# EAGLE board Schematic_IR _1.0 (EAGLE 9.6.2)
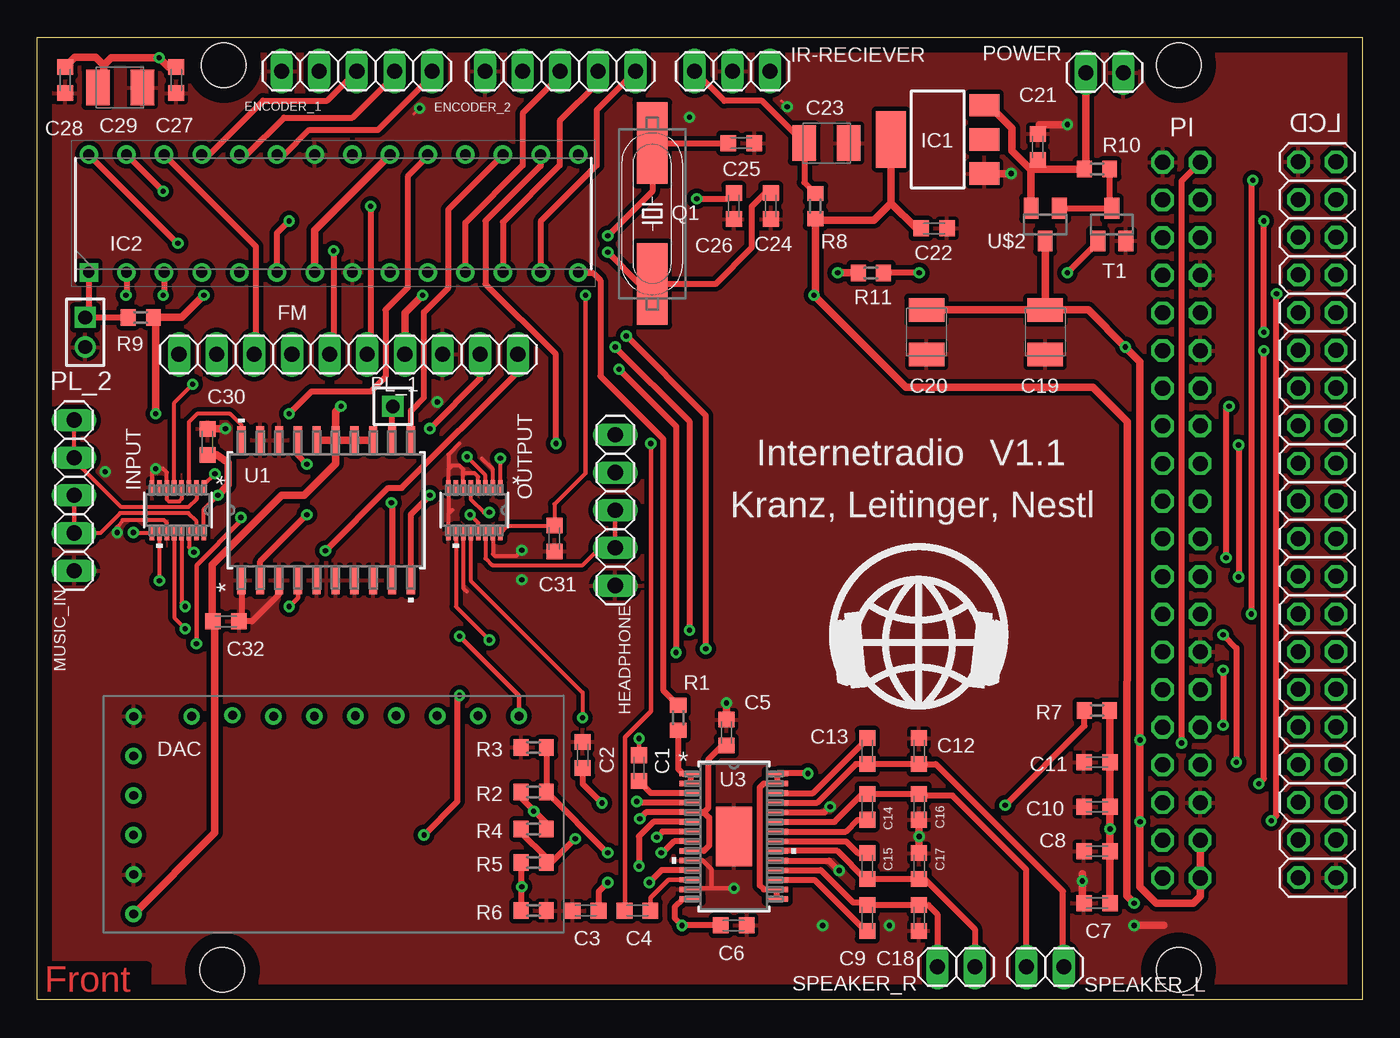
[diagram p0: board, top side]
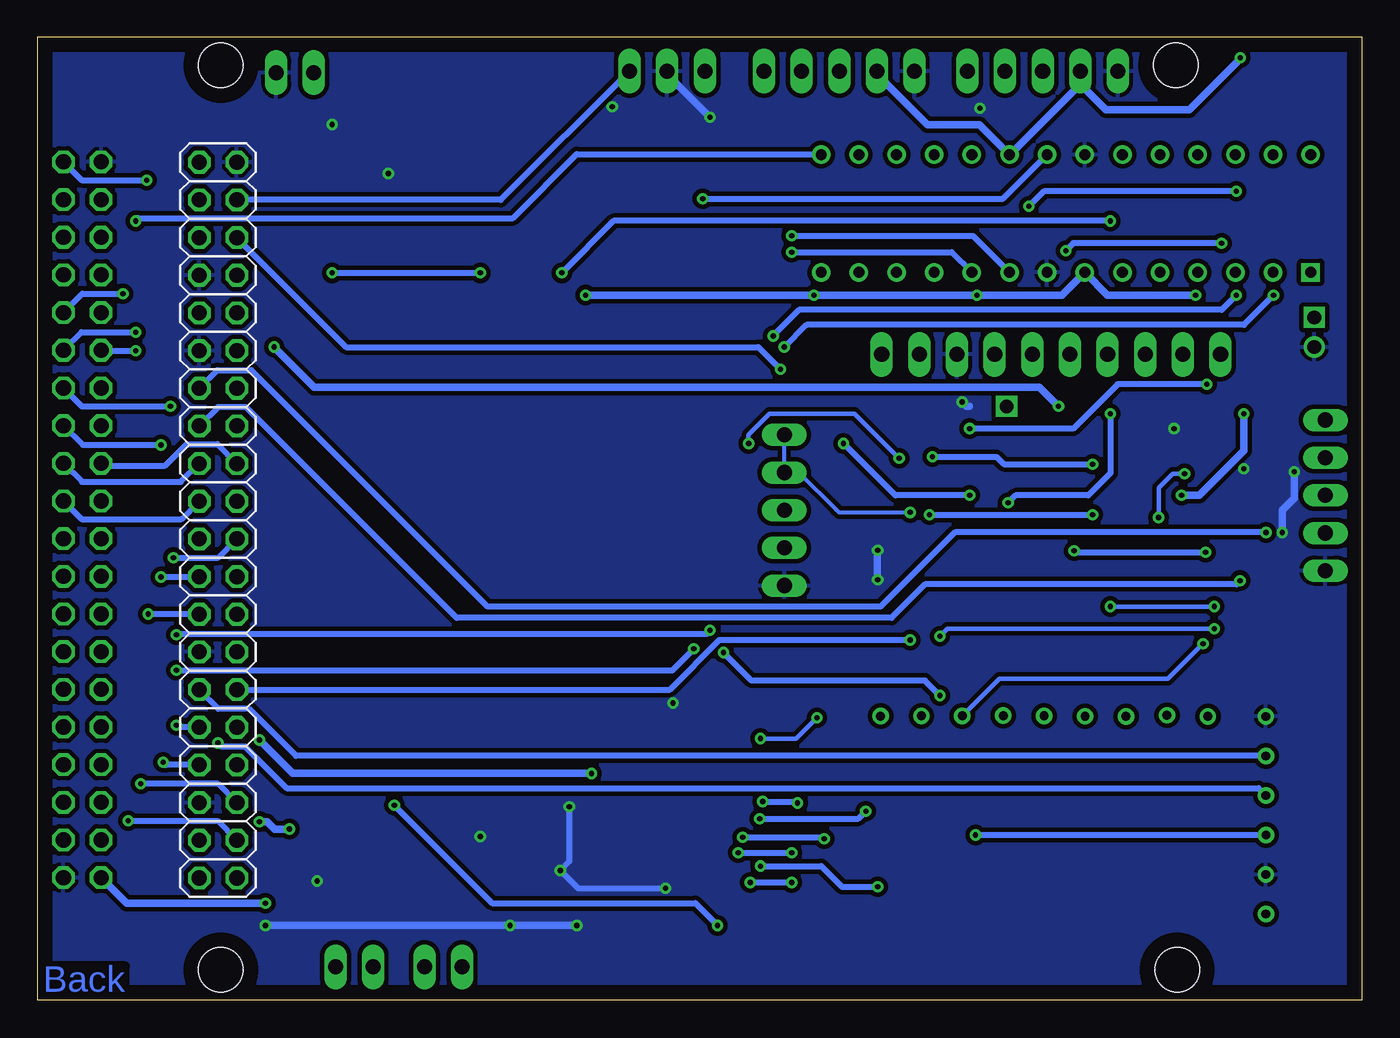
[diagram p1: board, bottom side, seen from below]

Size 89.4 x 64.9 mm. Coordinates in mm from the lower left corner, seen from the top.
Outline: 0,0 0,64.9 89.4,64.9 89.4,0 0,0
Copper layers (1*16): Top 0.035mm / dielectric 1.5mm / Bottom 0.035mm
Design rules "default *": minimum track width 0.2mm, minimum drill 0.2mm, track to track 5mil, track to pad 10mil, pad to pad 5mil, via to via 10mil, smd to smd 6mil, copper to edge 40mil, drill to drill 6mil, minimum pad ring 10mil, minimum via ring 8mil, stop-mask expansion 4mil, vias tented up to drill 0mil, thermal gap 10mil
Holes 3 mm at 77,2 77,63 12.6,63 12.5,2

## Footprints (pad centres in the part's own frame; a part is rotated, then mirrored left to right if it is on the bottom)
C0603K = smd 1.05 x 1.08: 1 -0.875,0; 2 0.875,0
SMC_B = smd 1.6 x 2.4: + -1.5,0; - 1.5,0
PCM5102 = drill 0.6: A3V3 1.375,16.968; AGND1 1.365,25.248; AGND2 1.355,19.728; BCK 4.074,2.01; DEMP 1.328,8.688; DIN 6.739,2.01; FLT 1.405,5.928; FMT 1.395,14.208; GND 12.068,2.02; LCK 9.403,2; LOUT 1.385,28.008; ROUT 1.365,22.488; SCK 1.41,2.02; VIN 14.732,2.01; XSMT 1.405,11.448
1X05 = drill 1.016 long: 1 -5.08,0; 2 -2.54,0; 3 0,0; 4 2.54,0; 5 5.08,0
1X10 = drill 1.016 long: 1 -11.43,0; 2 -8.89,0; 3 -6.35,0; 4 -3.81,0; 5 -1.27,0; 6 1.27,0; 7 3.81,0; 8 6.35,0; 9 8.89,0; 10 11.43,0
SOT223 = smd 1.5 x 2: 1 -2.3,-3.15; 2 0,-3.15; 3 2.3,-3.15 | smd 3.8 x 2: 4 0,3.15
DIP794W53P254L3467H457Q28N = drill 0.733 pad 1.133 square: 1 -3.969,16.51 | drill 0.733 pad 1.133: 2 -3.969,13.97; 3 -3.969,11.43; 4 -3.969,8.89; 5 -3.969,6.35; 6 -3.969,3.81; 7 -3.969,1.27; 8 -3.969,-1.27; 9 -3.969,-3.81; 10 -3.969,-6.35; 11 -3.969,-8.89; 12 -3.969,-11.43; 13 -3.969,-13.97; 14 -3.969,-16.51; 15 3.969,-16.51; 16 3.969,-13.97; 17 3.969,-11.43; 18 3.969,-8.89; 19 3.969,-6.35; 20 3.969,-3.81; 21 3.969,-1.27; 22 3.969,1.27; 23 3.969,3.81; 24 3.969,6.35; 25 3.969,8.89; 26 3.969,11.43; 27 3.969,13.97; 28 3.969,16.51
SOIC_309DYYR_TEX = smd 0.972 x 0.305: 1 -1.54,1.75; 2 -1.54,1.25; 3 -1.54,0.75; 4 -1.54,0.25; 5 -1.54,-0.25; 6 -1.54,-0.75; 7 -1.54,-1.25; 8 -1.54,-1.75; 9 1.54,-1.75; 10 1.54,-1.25; 11 1.54,-0.75; 12 1.54,-0.25; 13 1.54,0.25; 14 1.54,0.75; 15 1.54,1.25; 16 1.54,1.75
1X03 = drill 1.016 long: 1 -2.54,0; 2 0,0; 3 2.54,0
2X20 = drill 1.016 octagon: 1 -24.13,-1.27; 2 -24.13,1.27; 3 -21.59,-1.27; 4 -21.59,1.27; 5 -19.05,-1.27; 6 -19.05,1.27; 7 -16.51,-1.27; 8 -16.51,1.27; 9 -13.97,-1.27; 10 -13.97,1.27; 11 -11.43,-1.27; 12 -11.43,1.27; 13 -8.89,-1.27; 14 -8.89,1.27; 15 -6.35,-1.27; 16 -6.35,1.27; 17 -3.81,-1.27; 18 -3.81,1.27; 19 -1.27,-1.27; 20 -1.27,1.27; 21 1.27,-1.27; 22 1.27,1.27; 23 3.81,-1.27; 24 3.81,1.27; 25 6.35,-1.27; 26 6.35,1.27; 27 8.89,-1.27; 28 8.89,1.27; 29 11.43,-1.27; 30 11.43,1.27; 31 13.97,-1.27; 32 13.97,1.27; 33 16.51,-1.27; 34 16.51,1.27; 35 19.05,-1.27; 36 19.05,1.27; 37 21.59,-1.27; 38 21.59,1.27; 39 24.13,-1.27; 40 24.13,1.27
1X01M = drill 0.914 square: 1 0,0
1X02M = drill 0.914 square: 1 -1,0 | drill 0.914: 2 1,0
1X02 = drill 1.016 long: 1 -1.27,0; 2 1.27,0
11.4X4.5 = smd 5.5 x 2.08: 1 -4.75,0; 2 4.75,0
R0603 = smd 1 x 1.1: 1 -0.85,0; 2 0.85,0
SOT23 = smd 1 x 1.4: 1 -0.95,-1.1; 2 0.95,-1.1; 3 0,1.1
M20B_TEX = smd 1.887 x 0.558: 1 -4.728,5.715; 2 -4.728,4.445; 3 -4.728,3.175; 4 -4.728,1.905; 5 -4.728,0.635; 6 -4.728,-0.635; 7 -4.728,-1.905; 8 -4.728,-3.175; 9 -4.728,-4.445; 10 -4.728,-5.715; 11 4.728,-5.715; 12 4.728,-4.445; 13 4.728,-3.175; 14 4.728,-1.905; 15 4.728,-0.635; 16 4.728,0.635; 17 4.728,1.905; 18 4.728,3.175; 19 4.728,4.445; 20 4.728,5.715
PWP28_2P4X3.4_TEX = smd 1.462 x 0.355: 1 -2.921,4.225; 2 -2.921,3.575; 3 -2.921,2.925; 4 -2.921,2.275; 5 -2.921,1.625; 6 -2.921,0.975; 7 -2.921,0.325; 8 -2.921,-0.325; 9 -2.921,-0.975; 10 -2.921,-1.625; 11 -2.921,-2.275; 12 -2.921,-2.925; 13 -2.921,-3.575; 14 -2.921,-4.225; 15 2.921,-4.225; 16 2.921,-3.575; 17 2.921,-2.925; 18 2.921,-2.275; 19 2.921,-1.625; 20 2.921,-0.975; 21 2.921,-0.325; 22 2.921,0.325; 23 2.921,0.975; 24 2.921,1.625; 25 2.921,2.275; 26 2.921,2.925; 27 2.921,3.575; 28 2.921,4.225 | smd 2.413 x 4.013: EPAD 0,0

## Placement (x,y rotation side)
C1  1µF  [C0603K]  40.6,15.6 270 top
C2  1µF  [C0603K]  36.8,16.5 270 top
C3  1µF  [C0603K]  37,6 0 top
C4  1µF  [C0603K]  40.5,6 0 top
C5  1µF  [C0603K]  46.5,18 90 top
C6  1µF  [C0603K]  47,5 180 top
C7  1nF  [C0603K]  71.5,6.5 180 top
C8  100nF  [C0603K]  71.5,10 180 top
C9  220nF  [C0603K]  56,5.5 90 top
C10  1nF  [C0603K]  71.5,13 180 top
C11  100nF  [C0603K]  71.5,16 180 top
C12  1nF  [C0603K]  59.5,16.75 90 top
C13  220nF  [C0603K]  56,16.75 270 top
C14  220nF  [C0603K]  56,13 90 top
C15  220nF  [C0603K]  56,9 270 top
C16  1nF  [C0603K]  59.5,13 90 top
C17  1nF  [C0603K]  59.5,9 90 top
C18  1nF  [C0603K]  59.5,5.5 90 top
C19  100µF  [SMC_B]  68,45 270 top
C20  100µF  [SMC_B]  60,45 270 top
C21  0,1uF  [C0603K]  67.5,57.5 270 top
C22  10uF  [C0603K]  60.5,52 180 top
C23  0.1µF  [SMC_B]  53.25,57.75 0 top
C24  20pF  [C0603K]  49.5,53.5 90 top
C25  20pF  [C0603K]  47.5,57.75 180 top
C26  20pF  [C0603K]  47,53.5 270 top
C27  1µF  [C0603K]  9.4,62 270 top
C28  1µF  [C0603K]  1.9,62 270 top
C29  4,7µF  [SMC_B]  5.6,61.5 0 top
C30  0.1µF  [C0603K]  11.5,37.6 270 top
C31  0.1µF  [C0603K]  34.9,31.1 90 top
C32  0.1µF  [C0603K]  12.75,25.5 0 top
DAC  PCM5102  [PCM5102]  4.5,20.5 270 top
ENCODER_1  [1X05]  21.57,62.6 180 top
ENCODER_2  [1X05]  35.29,62.6 180 top
FM  [1X10]  21,43.5 180 top
HEADPHONE  [1X05]  39,33 90 top
IC1  LD117AS33TR  [SOT223]  60.75,58 90 top
IC2  ATMEGA328P-PU  [DIP794W53P254L3467H457Q28N]  20,53 90 top
INPUT  TMUX1309DYYR  [SOIC_309DYYR_TEX]  9.5,33 270 top
IR-RECIEVER  [1X03]  46.9,62.6 180 top
LCD  [2X20]  86.35,32.35 90 top
MUSIC_IN  [1X05]  2.5,34 90 top
OUTPUT  TMUX1309DYYR  [SOIC_309DYYR_TEX]  29.5,33 270 top
PI  [2X20]  77.19,32.33 90 bottom
PL_1  [1X01M]  24,40 270 top
PL_2  [1X02M]  3.25,45 270 top
POWER  [1X02]  72,62.5 0 top
Q1  [11.4X4.5]  41.5,53 90 top
R1  10k  [R0603]  43.25,19 270 top
R2  56k  [R0603]  33.5,14 180 top
R3  39k  [R0603]  33.5,17 0 top
R4  33k  [R0603]  33.5,11.5 0 top
R5  33k  [R0603]  33.5,9.25 0 top
R6  33k  [R0603]  33.5,6 180 top
R7  10  [R0603]  71.5,19.5 0 top
R8  100  [R0603]  52.5,53.5 270 top
R9  10k  [R0603]  7,46 0 top
R10  10k  [R0603]  71.5,56 180 top
R11  10k  [R0603]  56.25,49 0 top
SPEAKER_L  [1X02]  68,2.2 180 top
SPEAKER_R  [1X02]  62,2.2 180 top
T1  BC850  [SOT23]  72.5,52.25 0 top
U1  LM1972M/NOPB  [M20B_TEX]  19.5,33 90 top
U3  TPA3144D2PWP  [PWP28_2P4X3.4_TEX]  47,11 0 top
U$1  [LOGO]  59.5,24 0 top
U$2  P-KANAL  [SOT23]  68,52.25 180 top

## Library data of the parts
C1-C32 = rcl; SPICEPREFIX: C
DAC U$1 U$2 = Fancy_InternetRadio
ENCODER_1 ENCODER_2 LCD PI = pinhead
FM HEADPHONE IR-RECIEVER MUSIC_IN PL_1 PL_2 POWER SPEAKER_L SPEAKER_R = pinhead-ext
IC1 = v-reg
IC2 = Fancy_InternetRadio; DESCRIPTION: MICROCHIP - ATMEGA328P-PU. - MICROCONTROLLER MCU, 8 BIT, ATMEGA, 20MHZ, DIP-28; HEIGHT: 4.572mm; MANUFACTURER_NAME: Microchip; MANUFACTURER_PART_NUMBER: ATMEGA328P-PU; MOUSER_PART_NUMBER: 556-ATMEGA328P-PU; MOUSER_PRICE-STOCK: https://www.mouser.co.uk/ProductDetail/Microchip-Technology-Atmel/ATMEGA328P-PU/?qs=K8BHR703ZXguOQv3sKbWcg%3D%3D
INPUT OUTPUT = Fancy_InternetRadio; BUILT_BY: EMA_Matt; COPYRIGHT: Copyright (C) 2018 Accelerated Designs. All rights reserved; DATASHEET: https://www.ti.com/lit/ds/symlink/tmux1309.pdf?ts=1598032150860&ref_url=https%253A%252F%252Fwww.ti.com%252Fsitesearch%252Fdocs%252Funiversalsearch.tsp%253FsearchTerm%253DTMUX1309DYYR; MANUFACTURER_PART_NUMBER: TMUX1309DYYR; SOURCELIBRARY: TI_2020-08-21; VENDOR: Texas Instruments
Q1 = crystal-geyer_V1_0
R1-R11 = eagle-ltspice; SPICEMODEL: NONE; SPICEPREFIX: R
T1 = transistor-neu-to92
U1 = Fancy_InternetRadio; BUILT_BY: EMA_UL_Team; MANUFACTURER_PART_NUMBER: LM1972M/NOPB; SOURCELIBRARY: National_2014-06-20; VENDOR: Texas Instruments
U3 = Fancy_InternetRadio; BUILT_BY: EMA_Molly; COPYRIGHT: Copyright (C) 2018 Accelerated Designs. All rights reserved; MANUFACTURER_PART_NUMBER: TPA3144D2PWP; SOURCELIBRARY: TI_2019-05-11; VENDOR: Texas Instruments

## Nets
3V3: C22.2 C27.1 C28.1 C29.+ C30.2 C31.2 ENCODER_1.4 ENCODER_2.4 FM.4 IC1.4 IC2.7 IC2.20 INPUT.16 LCD.2 OUTPUT.16 R8.2 R9.2
5V: C7.1 C8.1 C10.1 C11.1 C19.+ C20.+ C32.1 DAC.VIN PI.2 PI.4 R7.2 U1.13 U1.14 U1.15 U1.16 U3.15 U3.16 U3.27 U3.28 U$2.3
/RST: IC2.1 PL_2.1 R9.1
/SEN: FM.7
/SHUTDOWN: IC2.14 R1.1
AREF: C26.1 IC2.21
AT_CLOCK: IC2.19 U1.9
AT_DIN: IC2.17 U1.11
AT_DOUT: PL_1.1 U1.12
AT_L/S: IC2.16 U1.10
AUDIO_IN_L: INPUT.13 U1.4
AUDIO_IN_R: INPUT.3 U1.20
AUDIO_OUT_L: OUTPUT.13 U1.2
AUDIO_OUT_R: OUTPUT.3 U1.17
BCK: DAC.BCK PI.12
CS: LCD.23 PI.24
DAC_LOUT: DAC.LOUT INPUT.12
DAC_ROUT: DAC.ROUT INPUT.1
DC: LCD.25 PI.18
DIN: DAC.DIN PI.40
FM_/RST: FM.8 IC2.26
FM_GPIO01: FM.9
FM_GPIO02: FM.10
FM_LOUT: FM.1 INPUT.14
FM_ROUT: FM.2 INPUT.5
FM_SCLK: FM.6 IC2.28
FM_SDIO: FM.5 IC2.27
GND: C2.1 C3.1 C5.2 C6.1 C7.2 C8.2 C10.2 C11.2 C12.2 C16.1 C17.2 C18.1 C19.- C20.- C21.1 C22.1 C23.- C24.1 C25.1 C26.2 C27.2 C28.2 C29.- C30.1 C31.1 C32.2 DAC.GND DAC.SCK ENCODER_1.5 ENCODER_2.5 FM.3 HEADPHONE.1 IC1.1 IC2.8 IC2.22 INPUT.4 INPUT.6 INPUT.8 INPUT.11 IR-RECIEVER.2 LCD.1 LCD.40 MUSIC_IN.1 OUTPUT.2 OUTPUT.4 OUTPUT.6 OUTPUT.8 OUTPUT.9 OUTPUT.11 OUTPUT.15 PI.6 PI.14 PI.30 PI.34 PI.39 PL_2.2 POWER.2 R3.1 R6.1 T1.2 U1.1 U1.3 U1.5 U1.6 U1.7 U1.8 U1.18 U1.19 U3.10 U3.13 U3.19 U3.24 U3.EPAD
GVDD: C5.1 R2.2 R4.2 U3.5 U3.9
HP_L: HEADPHONE.2 HEADPHONE.3 OUTPUT.14
HP_R: HEADPHONE.4 HEADPHONE.5 OUTPUT.5
IN_LEFT: C1.1 OUTPUT.12
IN_RIGHT: C4.1 OUTPUT.1
INT: LCD.39 PI.16
IR_DATA: IR-RECIEVER.1 PI.37
LCK: DAC.LCK PI.35
MUSIC_L: INPUT.15 MUSIC_IN.2 MUSIC_IN.3
MUSIC_R: INPUT.2 MUSIC_IN.4 MUSIC_IN.5
MUX-IN_A0: INPUT.10 PI.26
MUX-IN_A1: INPUT.9 PI.28
MUX-OUT_A0: OUTPUT.10 PI.11
N$1: R1.2 U3.1 U3.2
N$2: C4.2 U3.12
N$3: PI.7
N$4: R11.2 T1.1
N$5: PI.13
N$6: PI.15
N$7: R4.1 R5.2 U3.7
N$8: PI.21
N$9: R2.1 R3.2 U3.8
N$10: PI.27
N$11: PI.29
N$12: PI.31
N$13: PI.33
N$14: R5.1 R6.2 U3.6
N$16: PI.36
N$17: PI.38
N$18: C6.2 R7.1 U3.14
N$19: R10.1 T1.3 U$2.1
N$20: C24.2 IC2.10 Q1.1
N$21: C25.2 IC2.9 Q1.2
N$22: PI.32
N$25: C1.2 U3.3
N$28: C2.2 U3.4
N$29: C13.1 U3.26
N$30: C23.+ IR-RECIEVER.3 R8.1
N$31: DAC.FLT
N$32: C3.2 U3.11
N$33: C14.1 U3.22
N$34: C15.1 U3.21
N$35: DAC.DEMP
N$36: C9.1 U3.17
N$38: DAC.XSMT
N$39: DAC.FMT
N$40: DAC.A3V3
N$41: DAC.AGND2
N$46: DAC.AGND1
OUTNL: C14.2 C16.2 SPEAKER_L.2 U3.23
OUTNR: C15.2 C17.1 SPEAKER_R.1 U3.20
OUTPL: C12.1 C13.2 SPEAKER_L.1 U3.25
OUTPR: C9.2 C18.2 SPEAKER_R.2 U3.18
POWER: IC2.6 R11.1
PWM: IC2.15 LCD.29
ROT1_A: ENCODER_1.1 IC2.23
ROT1_B: ENCODER_1.2 IC2.24
ROT1_SW: ENCODER_1.3 IC2.25
ROT2_A: ENCODER_2.1 IC2.13
ROT2_B: ENCODER_2.2 IC2.12
ROT2_SW: ENCODER_2.3 IC2.11
RST: LCD.21 PI.22
RXD: IC2.2 PI.8
SCK: LCD.24 PI.23
SCL: LCD.30 PI.5
SDA: LCD.31 PI.3
SDI: LCD.27 PI.19
SUPPLY: C21.2 IC1.3 POWER.1 R10.2 U$2.2
TXD: IC2.3 PI.10

## Tracks (layer width: path | path; a pad name or v marks a point on that pad's centre or on a via)
3V3  (via drill 0.35)
  Top 0.254: OUTPUT.16 31.7,31.9 34.83,31.9 C31.2 34.9,33.4 37,35.5 | INPUT.16 11.25,33.05 v12.2,34
  Top 0.305: v37,47.5 37,35.5
  Top 0.508: 56.9,57.3 IC1.4 57.6,53.7 | v74,6.5 73.5,7 73.55,35.95 73.55,38.95 71.2,41.3 58.6,41.3 v52.4,47.5 52.5,47.6 R8.2 52.6,52.55 56.45,52.55 57.6,53.7 | v8,39.5 8,45.85 R9.2 9.75,46 v11.25,47.5 | IC2.7 18.73,51.89 IC2.20 | v12.2,34 12.9,34.7 12.9,36.21 12.11,36.73 C30.2 | FM.4 24.81,46.31 v26,47.5 | 9.4,63 C27.1 8.88,62.88 v8.24,63.51 | C28.1 2.56,63.53 3.97,63.53 4.5,63 | C22.2 59.3,52 57.6,53.7 | v8.24,63.51 8.22,63.51 | 4.5,63 4.5,62 4.1,61.6 C29.+ | v8.24,63.51 v8.24,63.5 5,63.5 4.5,63
  Bottom 0.508: v52.4,47.5 v37,47.5 v26,47.5 20.26,47.5 IC2.7 17.2,47.5 v11.25,47.5 | LCD.2 83.36,6.5 v74,6.5 | v8,39.5 8,37 11,34 v12.2,34 | 19.03,61.97 ENCODER_1.4 19.03,61.72 | 23.53,56.97 IC2.20 | ENCODER_2.4 32.75,62.4 29.35,59 25.84,59 IC2.20 | 19.03,61.72 23.78,56.97 IC2.20 | v8.24,63.51 8.24,63.44 11.68,60 17.31,60 19.03,61.72
5V  (via drill 0.35)
  Top 0.406: U3.15 U3.16 49.02,7.42 48.73,7.71 48.73,14.29 49,14.56 49.91,14.56 U3.27 U3.28 49.95,15.25 v52,15.25
  Top 0.508: PI.4 PI.2 78.46,6.96 78,6.5 75.5,6.5 74.4,7.6 v74.4,12 v74.4,17.5 74.4,43 v73.4,44 70.9,46.5 C19.+ | U1.13 U1.14 U1.15 | U1.16 U1.15 | U1.15 20.14,39.63 v20.5,40 | U1.15 20.14,36.13 18,34 16.5,34 11.83,29.33 11.83,25.55 C32.1 11.98,25.4 11.98,11.24 DAC.VIN | C7.1 C8.1 v72.38,11.5 C10.1 C11.1 72.38,19.48 R7.2 | C19.+ U$2.3 | C19.+ C20.+ | C19.+ 68,46.15
  Bottom 0.508: v20.5,40 21.8,41.3 70.7,41.3 v73.4,44 | v74.4,12 73.88,12 73.38,11.5 v72.38,11.5 | v52,15.25 72.15,15.25 v74.4,17.5
/RST
  Top 0.406: IC2.1 3.49,46.24 PL_2.1 R9.1
/SHUTDOWN
  Top 0.406: IC2.14 36.54,49 37.5,49 38,48.5 38,42.04 42.23,37.8 42.23,20.87 R1.1
AREF  (via drill 0.35)
  Top 0.406: C26.1 46.6,53.98 44.52,53.98 v44.5,54
  Bottom 0.406: v44.5,54 24.24,54 IC2.21
AT_CLOCK  (via drill 0.35)
  Top 0.406: IC2.19 26.35,56.85 25,55.5 25,48 23.5,46.5 23.5,42 22.5,41 18.5,41 v17,39.5 | v23.9,33.5 23.95,33.45 U1.9
  Bottom 0.406: v17,39.5 17,35.5 18.5,34 23.4,34 v23.9,33.5
AT_DIN
  Top 0.406: IC2.17 27.75,53.29 27.75,48 26.1,46.35 26.1,40.6 25.21,39.72 U1.11
AT_DOUT
  Top 0.406: U1.12 23.95,39.95 PL_1.1
AT_L/S  (via drill 0.35)
  Top 0.406: IC2.16 33.97,56.22 30.25,52.5 30.25,48.25 35,43.5 v35,37.5 | U1.10 25.21,32.72 v26.5,34
  Bottom 0.406: v26.5,34 31.5,34 v35,37.5
AUDIO_IN_L  (via drill 0.35)
  Top 0.254: INPUT.13 9.75,26.75 v10,26.5
  Top 0.305: v17,26.5 17.59,27.09 U1.4
  Bottom 0.305: v10,26.5 v17,26.5
AUDIO_IN_R
  Top 0.254: U1.20 13.79,38.73 13.01,39.5 10.8,39.5 10.25,38.95 INPUT.3
AUDIO_OUT_L  (via drill 0.35)
  Top 0.254: v29.2,32.7 29.75,32.15 OUTPUT.13
  Top 0.406: U1.2 15.05,29.55 v18.2,32.7
  Bottom 0.406: v29.2,32.7 v18.2,32.7
AUDIO_OUT_R  (via drill 0.35)
  Top 0.254: OUTPUT.3 30.25,35.35 v29,36.6
  Top 0.406: U1.17 17.59,36.7 v18.2,36.1
  Bottom 0.406: v29,36.6 24.7,36.6 24.2,36.1 v18.2,36.1
BCK
  Bottom 0.406: PI.12 77.16,19.6 75.1,19.6 71.93,16.43 DAC.BCK
CS
  Bottom 0.406: LCD.23 86.36,34.9 79.7,34.9 PI.24
DAC_LOUT  (via drill 0.35)
  Top 0.254: INPUT.12 9.25,25.75 v10,25
  Top 0.305: DAC.LOUT 32.51,20.49 v28.5,24.5
  Bottom 0.305: v10,25 28,25 v28.5,24.5
DAC_ROUT  (via drill 0.35)
  Top 0.254: INPUT.1 11.25,34.7 v12,35.45
  Top 0.305: v10.75,24 10.75,29.3 13.75,32.3 v13.75,32.5
  Bottom 0.305: v13.75,32.5 13.75,34.5 12.8,35.45 v12,35.45 | v10.75,24 13.12,21.64 24.49,21.64 DAC.ROUT
DC  (via drill 0.35)
  Top 0.406: v81.05,37.4 v81.05,28.5
  Bottom 0.406: LCD.25 86.32,37.4 v81.05,37.4 | v81.05,28.5 78.48,28.5 PI.18
DIN  (via drill 0.35)
  Top 0.406: v77.2,17.3 77.19,17.31 77.19,55.19 PI.40
  Bottom 0.406: v77.2,17.3 76.95,17.05 75.35,17.05 72.56,14.26 7.01,14.26 DAC.DIN
FM_/RST
  Top 0.406: IC2.26 14.75,50.79 14.75,43.6 FM.8
FM_LOUT  (via drill 0.35)
  Top 0.254: INPUT.14 10.25,30.5 v10.58,30.17
  Top 0.406: v19.45,30.27 23.68,34.5 24.6,34.5 32.43,42.33 FM.1
  Bottom 0.406: v19.45,30.27 19.35,30.17 v10.58,30.17
FM_ROUT  (via drill 0.35)
  Top 0.254: INPUT.5 9.25,40.25 v10.5,41.5
  Top 0.406: v26.5,38.5 29.89,41.89 FM.2
  Bottom 0.406: v10.5,41.5 16.5,41.5 19.5,38.5 v26.5,38.5
FM_SCLK  (via drill 0.35)
  Top 0.406: v9.5,51 9.46,51 IC2.28 | v20,50.5 20,43.77 FM.6
  Bottom 0.406: v20,50.5 19.5,51 v9.5,51
FM_SDIO  (via drill 0.35)
  Top 0.406: FM.5 22.5,43.73 v22.5,53.5 | IC2.27 v8.5,54.5
  Bottom 0.406: v22.5,53.5 21.5,54.5 v8.5,54.5
GND  (via drill 0.35)
  Top 0.2: v25.8,60.1 25.4,59.7 | v50.6,60.2 50.2,60.6
  Top 0.254: OUTPUT.15 30.75,30.05 30.9,29.9 32.3,29.9 v32.7,30.3 | OUTPUT.8 27.75,35.75 | 27.75,35.75 28,36 28.5,36 28.75,35.75 28.75,35.5 | OUTPUT.6 28.75,35.5 | OUTPUT.4 29.75,35.25 29.5,35.5 28.75,35.5 | OUTPUT.2 30.75,35.75 30,36.5 | 28.5,37.5 27.75,36.75 27.75,35.75 | INPUT.4 9.75,33.75 9.6,33.6 8.9,33.6 8.75,33.75 INPUT.6 8.75,35.55 8.5,35.8 v8,35.8 7.75,35.55 INPUT.8 7.75,35.25 | INPUT.11 8.75,32.15 8.57,32.33 5.77,32.33 5.4,31.86 v5.4,31.5 | OUTPUT.11 28.75,27.75 29,27.5 | OUTPUT.9 27.75,32.75 | 27.75,32.75 | 27.75,32.75 28,33 | OUTPUT.8 | OUTPUT.8 27.75,32.75
  Top 0.305: U3.13 44.15,7.49 44.98,7.49 44.99,7.5 45.5,7.5 | 45.5,7.5 v47,7.5 | 44.88,9.41 44.11,9.41 U3.10 44.91,9.38 45.5,8.79 45.5,7.5
  Top 0.406: U3.24 53.12,12.62 v53.5,13 | U3.19 53.42,9.38 v54.1,8.7 | U1.3 16.32,27.32 14.5,25.5 C32.2 13.79,25.66 U1.1
  Top 0.508: v74,5 76,5 | C7.2 70.5,6.62 v70.5,8 70.5,8.5 | v46.5,20 C5.2 | IC1.1 v65.7,55.7 | C21.1 67.6,59 v69.5,59 | C16.1 v59.5,11 C17.2 | C30.1 11.53,38.5 v12.7,38.5
  Bottom 0.406: v47,7.5 52.9,7.5 v54.1,8.7 53.5,9.3 v53.5,13
  Bottom 0.508: v74,5 65,5 v57.5,5 v53,5 | IR-RECIEVER.2 46.9,62.4 v44,59.5 | v5.4,31.5 5.4,33 4.6,33.8 v4.6,35.6 | v27,40.3 26.7,40 26.5,40 | v32.7,30.3 v32.7,28.3
  pour Top (isolate 0.305): 0,65 0,0 89.5,0 89.5,65
  pour Bottom (isolate 0.305): 0,65.5 0,0 89.5,0 89.5,65.5
GVDD  (via drill 0.35)
  Top 0.406: 33.55,12.7 32.65,13.6 R2.2 | v33.5,12.7 33.55,12.7 | U3.5 41.08,12.62 v40.65,12.2 | 33.55,12.7 34.35,11.9 R4.2 | U3.5 44.98,12.62 45.27,12.91 45.27,16.17 46.1,17 C5.1 | U3.5 44.09,12.61 45,12.61 45.34,12.27 45.34,10.38 44.98,10.03 U3.9
  Bottom 0.406: v40.65,12.2 34,12.2 v33.5,12.7
HP_L
  Top 0.254: OUTPUT.14 30.25,29.75 30.7,29.3 36.8,29.3 37.98,30.48 38,30.46 HEADPHONE.2
  Top 0.3: HEADPHONE.2 HEADPHONE.3
HP_R  (via drill 0.35)
  Top 0.254: OUTPUT.5 29.25,33.75 30.15,32.85 v30.5,32.85
  Bottom 0.254: HEADPHONE.5 HEADPHONE.4 38,35.54 35.48,33.02 35.31,32.85 v30.5,32.85
IN_LEFT  (via drill 0.35)
  Top 0.254: v36.8,19 36.8,20.7 29.25,28.25 OUTPUT.12
  Top 0.305: C1.1 v40.6,17.6
  Bottom 0.305: v36.8,19 38.2,17.6 v40.6,17.6
IN_RIGHT  (via drill 0.35)
  Top 0.254: OUTPUT.1 v31.25,36.5
  Top 0.305: v41.4,37.5 41.4,19.45 39.65,17.7 39.65,6.03 C4.1 | v31.25,36.5
  Bottom 0.305: v31.25,36.5 34.25,39.5 40,39.5 41.4,38.1 v41.4,37.5
INT  (via drill 0.35)
  Top 0.406: v82,55.25 81.9,55.15 v81.9,26
  Bottom 0.406: LCD.39 86.39,55.25 v82,55.25 | v81.9,26 78.48,26 PI.16
IR_DATA
  Bottom 0.406: IR-RECIEVER.1 58.12,53.92 PI.37
LCK  (via drill 0.35)
  Top 0.406: v28.5,20.5 28.35,20.35 28.35,13.35 v26.1,11.1 | v39.25,42.5 43.1,38.65 v43.1,23.4
  Bottom 0.406: PI.35 68.54,44 40.75,44 v39.25,42.5 | DAC.LCK v26.1,11.1 | v28.5,20.5 29.5,21.5 41.2,21.5 v43.1,23.4
MUSIC_L
  Top 0.254: INPUT.15 10.75,32.25 10.2,32.8 5.6,32.8 4.26,31.46 MUSIC_IN.2
  Top 0.3: MUSIC_IN.2 MUSIC_IN.3
MUSIC_R
  Top 0.254: INPUT.2 10.75,33.75 10.2,33.2 5.68,33.2 2.5,36.38 MUSIC_IN.4 MUSIC_IN.5
MUX-IN_A0  (via drill 0.35)
  Top 0.254: INPUT.10 v8.25,28.25
  Top 0.305: v8.25,28.25
  Bottom 0.406: v8.25,28.25 8.5,28 29.5,28 31.77,25.73 61.09,25.73 75.31,39.95 77.19,39.95 PI.26
MUX-IN_A1  (via drill 0.35)
  Top 0.254: INPUT.9 6.54,31.46
  Top 0.305: 6.54,31.46 v6.5,31.5
  Bottom 0.406: PI.28 77.23,42.45 74.95,42.45 59,26.5 32.5,26.5 27.5,31.5 v6.5,31.5
MUX-OUT_A0  (via drill 0.35)
  Top 0.254: OUTPUT.10 28.25,26.5 v30.5,24.25
  Bottom 0.406: PI.11 46.72,20.9 43.37,24.25 v30.5,24.25
N$1
  Top 0.406: U3.2 U3.1 43.58,15.22 43.25,15.55 R1.2
N$2
  Top 0.305: U3.12 42.58,8.07 41.38,6.87 C4.2
N$4  (via drill 0.35)
  Top 0.406: v59.5,49 R11.2 | T1.1 71.55,51.05 v69.5,49
  Bottom 0.406: v69.5,49 v59.5,49
N$7  (via drill 0.35)
  Top 0.406: U3.7 42.17,11.32 v41.8,10.95 | v36.3,10.85 34.7,9.25 R5.2 34.35,9.55 32.65,11.25 R4.1
  Bottom 0.406: v41.8,10.95 36.4,10.95 v36.3,10.85
N$9  (via drill 0.35)
  Top 0.406: U3.8 42.98,10.68 42.2,9.9 v42.1,9.9 | R3.2 R2.1 38.45,9.9 v38.5,9.9
  Bottom 0.406: v42.1,9.9 v38.5,9.9
N$14  (via drill 0.35)
  Top 0.254: v32.7,7.6 32.7,7.55 32.65,7.5
  Top 0.406: U3.6 41.58,11.97 40.6,11 v40.6,9 | R5.1 32.65,7.5 R6.2
  Bottom 0.406: v40.6,9 36.5,9 35.1,7.6 v32.7,7.6
N$18  (via drill 0.35)
  Top 0.406: C6.2 v43.5,5 43,5.5 43,6.25 43.52,6.78 U3.14 | v65.3,13.1 70.65,18.45 R7.1
  Bottom 0.406: v65.3,13.1 58.7,6.5 45,6.5 v43.5,5
N$19
  Top 0.406: U$2.1 T1.3 72.35,53.5 R10.1
N$20  (via drill 0.35)
  Top 0.406: Q1.1 40.65,48.25 v38.5,50.4 | Q1.1 41,47.75 41,46.5 41.62,45.88 | C24.2 49.1,54.38 48.2,53.48 48.2,50.7 45.75,48.25 Q1.1
  Bottom 0.406: IC2.10 27.72,50.4 v38.5,50.4
N$21  (via drill 0.35)
  Top 0.406: C25.2 Q1.2 41.5,54.5 v38.5,51.5
  Bottom 0.406: IC2.9 26.28,51.5 v38.5,51.5
N$25
  Top 0.406: C1.2 41.4,13.93 U3.3
N$28  (via drill 0.35)
  Top 0.406: v38.1,13.25 36.8,14.55 C2.2 | U3.4 40.52,13.28 v40.45,13.35
  Bottom 0.406: v40.45,13.35 38.2,13.35 v38.1,13.25
N$29
  Top 0.305: 56,17.52 C13.1
  Top 0.406: U3.26 52.34,13.93 55.93,17.52 56,17.52
N$30
  Top 0.406: IR-RECIEVER.3 46.36,60.6 48.9,60.6 C23.+ 51.75,55.1 R8.1
N$32  (via drill 0.35)
  Top 0.406: U3.11 42.12,8.72 v41.3,7.9 | v38.5,7.9 37.88,7.28 C3.2
  Bottom 0.406: v41.3,7.9 v38.5,7.9
N$33
  Top 0.406: U3.22 54.55,11.32 55.35,12.12 C14.1
N$34
  Top 0.406: U3.21 54.58,10.68 55.38,9.88 C15.1
N$36
  Top 0.406: U3.17 52.42,8.07 55.88,4.62 C9.1
OUTNL
  Top 0.406: SPEAKER_L.2 66.73,8.77 61.75,13.75 59.62,13.75 C16.2 C14.2 55.69,13.88 53.8,11.99 49.94,11.99 U3.23
OUTNR
  Top 0.406: U3.20 53.98,10.03 55.88,8.12 C15.2 C17.1 59.88,8.12 63.25,4.75 63.25,2.22 SPEAKER_R.1
OUTPL
  Top 0.406: SPEAKER_L.1 69.2,2.27 69.2,7.3 60.62,15.88 C12.1 C13.2 55.23,15.88 52.63,13.28 U3.25
OUTPR
  Top 0.406: U3.18 52.88,8.72 55.04,6.56 56,6.56 C9.2 C18.2 60.12,6.38 60.73,5.77 SPEAKER_R.2
POWER  (via drill 0.35)
  Top 0.406: IC2.6 16.19,51.69 v17,52.5
  Top 0.508: R11.1 v54,49
  Bottom 0.406: v17,52.5 50.5,52.5 v54,49
PWM  (via drill 0.35)
  Top 0.406: v82.75,45 v82.75,52.5
  Bottom 0.406: LCD.29 86.4,45 v82.75,45 | v82.75,52.5 82.55,52.7 57.3,52.7 53,57 36.54,57 IC2.15
ROT1_A
  Top 0.406: IC2.23 16.69,56.97 18.37,58.65 23,58.65 26.65,62.3 ENCODER_1.1
ROT1_B
  Top 0.406: IC2.24 14.15,56.97 16.65,59.47 21.28,59.47 24.11,62.3 ENCODER_1.2
ROT1_SW
  Top 0.406: IC2.25 11.61,56.97 15.25,60.61 19.58,60.61 ENCODER_1.3
ROT2_A
  Top 0.406: ENCODER_2.1 37.75,59.98 37.75,56.25 33.97,52.47 IC2.13
ROT2_B
  Top 0.406: ENCODER_2.2 37.83,61.83 35.25,59.25 35.25,56.25 31.43,52.43 IC2.12
ROT2_SW
  Top 0.406: ENCODER_2.3 35.29,62.29 32.75,59.75 32.75,56.25 28.89,52.39 IC2.11
RST
  Bottom 0.406: LCD.21 86.4,32.4 79.66,32.4 PI.22
RXD  (via drill 0.35)
  Top 0.406: v80,24.6 80.9,23.7 v80.9,16 | v44,24.9 44,39 v39,44 | IC2.2 6.03,47.53 v6,47.5
  Bottom 0.406: PI.8 80.72,15.82 v80.9,16 | v80,24.6 79.94,24.66 44.24,24.66 v44,24.9 | v6,47.5 8,45.5 37.5,45.5 v39,44
SCK
  Bottom 0.406: LCD.24 84.92,36 80.75,36 79.3,37.45 77.23,37.45 PI.23
SCL  (via drill 0.35)
  Top 0.406: v82.4,14.55 82.75,14.9 v82.75,43.75
  Bottom 0.406: LCD.30 85.05,43.75 v82.75,43.75 | PI.5 77.19,14.55 v82.4,14.55
SDA  (via drill 0.35)
  Top 0.406: v83.6,47.6 83.6,12.4 v83.25,12.05
  Bottom 0.406: v83.6,47.6 86.34,47.6 LCD.31 | PI.3 77.23,12.05 v83.25,12.05
SDI  (via drill 0.35)
  Top 0.406: v80.4,40 80.2,39.8 v80.2,29.8
  Bottom 0.406: LCD.27 86.38,40 v80.4,40 | v80.2,29.8 77.18,29.8 PI.19
SUPPLY
  Top 0.508: C21.2 67.6,56 | 67.6,56 R10.2 70.73,56.08 POWER.1 | IC1.3 64.2,60.3 65.75,58.75 65.75,57.25 67,56 | 67,56 67.6,56 | U$2.2 67.05,55.95 67,56
TXD  (via drill 0.35)
  Top 0.406: v80,22.2 v80,18.5 | IC2.3 8.57,47.57 v8.5,47.5 | v39.75,44.75 45.1,39.4 v45.1,23.65
  Bottom 0.406: PI.10 79.86,18.36 v80,18.5 | v8.5,47.5 9.5,46.5 38,46.5 v39.75,44.75 | v80,22.2 46.55,22.2 v45.1,23.65

## Text on the board
Top: Front
Bottom: Back
tPlace: Internetradio | V1.1 | Kranz, Leitinger, Nestl